# Altium PCB roboARM_PCB_V1I1_1.PcbDoc (part 2 of 2)
Units mm, origin at the board's own origin, x right, y up, seen from the top; angles counter-clockwise.
Board outline 55 x 50 mm, 2 copper layers (Top Layer, Bottom Layer); 48 components, 40 nets, 193 pads, 2135 vias.
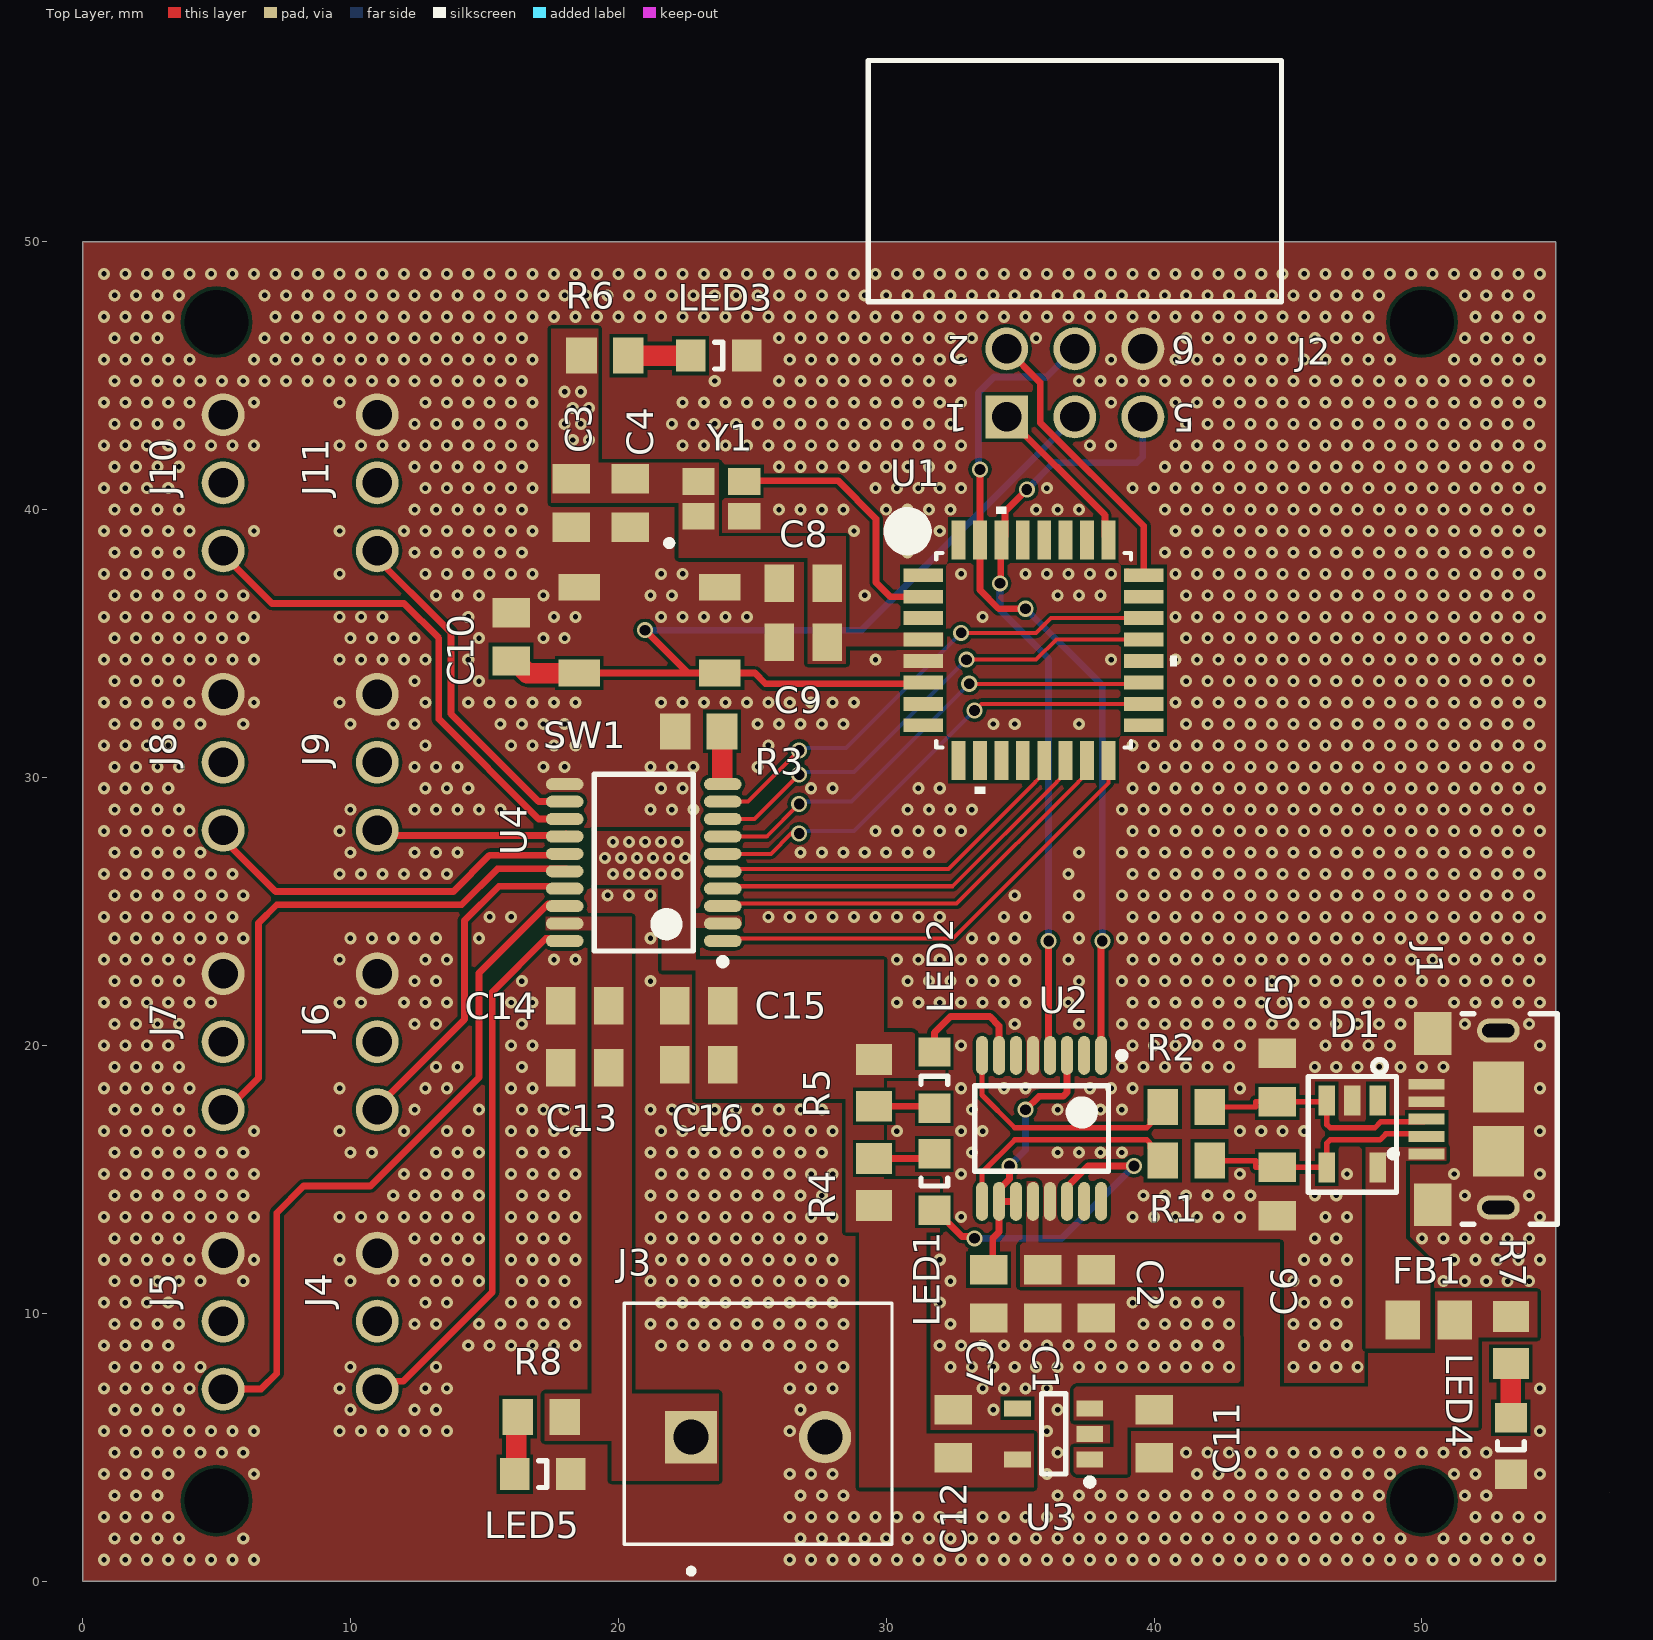
[diagram p0: Top Layer view]

## Via types
v1: diameter 0.45, hole 0.2, Top Layer to Bottom Layer, tented both sides, 2116 vias
v2: diameter 0.6, hole 0.4, Top Layer to Bottom Layer, tented both sides, 19 vias

## Nets (pads, with @x,y where several pads share a name; then routed paths per layer and width w, separated by ;. In a path a pad name is that pad's centre, name@x,y a point inside that pad or via, vN(x,y) a via of type N, cw(c..) or ccw(c..) an arc to the next point about the centre after c; other vN are vias at no path point) (continued)
GND: (continued)
  other v1: 0.8,0.8 1.6,0.8 2.4,0.8 3.2,0.8 4,0.8 4.8,0.8 5.6,0.8 6.4,0.8 26.4,0.8 27.2,0.8 28,0.8 28.8,0.8 29.6,0.8 30.4,0.8 31.2,0.8 32,0.8 32.8,0.8 33.6,0.8 34.4,0.8 35.2,0.8 36,0.8 36.8,0.8 37.6,0.8 38.4,0.8 39.2,0.8 40,0.8 40.8,0.8 41.6,0.8 42.4,0.8 43.2,0.8 44,0.8 44.8,0.8 45.6,0.8 46.4,0.8 47.2,0.8 48,0.8 48.8,0.8 49.6,0.8 50.4,0.8 51.2,0.8 52,0.8 52.8,0.8 53.6,0.8 54.4,0.8 1.2,1.6 2,1.6 2.8,1.6 3.6,1.6 6,1.6 26.8,1.6 27.6,1.6 28.4,1.6 29.2,1.6 30,1.6 30.8,1.6 31.6,1.6 32.4,1.6 33.2,1.6 34,1.6 34.8,1.6 35.6,1.6 36.4,1.6 37.2,1.6 38,1.6 38.8,1.6 39.6,1.6 40.4,1.6 41.2,1.6 42,1.6 42.8,1.6 43.6,1.6 44.4,1.6 45.2,1.6 46,1.6 46.8,1.6 47.6,1.6 48.4,1.6 49.2,1.6 50.8,1.6 51.6,1.6 52.4,1.6 53.2,1.6 54,1.6 0.8,2.4 1.6,2.4 2.4,2.4 3.2,2.4 26.4,2.4 27.2,2.4 28,2.4 28.8,2.4 29.6,2.4 30.4,2.4 31.2,2.4 32,2.4 32.8,2.4 33.6,2.4 34.4,2.4 35.2,2.4 36,2.4 36.8,2.4 37.6,2.4 38.4,2.4 39.2,2.4 40,2.4 40.8,2.4 41.6,2.4 42.4,2.4 43.2,2.4 44,2.4 44.8,2.4 45.6,2.4 46.4,2.4 47.2,2.4 48,2.4 52,2.4 52.8,2.4 53.6,2.4 54.4,2.4 1.2,3.2 2,3.2 2.8,3.2 26.8,3.2 27.6,3.2 28.4,3.2 36.4,3.2 37.2,3.2 38,3.2 38.8,3.2 39.6,3.2 40.4,3.2 41.2,3.2 42,3.2 42.8,3.2 43.6,3.2 44.4,3.2 45.2,3.2 46,3.2 46.8,3.2 47.6,3.2 48.4,3.2 51.6,3.2 52.4,3.2 0.8,4 1.6,4 2.4,4 3.2,4 6.4,4 26.4,4 27.2,4 28,4 36,4 41.6,4 42.4,4 43.2,4 44,4 44.8,4 45.6,4 46.4,4 47.2,4 48,4 48.8,4 51.2,4 52,4 54.4,4 1.2,4.8 2,4.8 2.8,4.8 3.6,4.8 4.4,4.8 5.2,4.8 6,4.8 36.4,4.8 41.2,4.8 42,4.8 42.8,4.8 43.6,4.8 44.4,4.8 45.2,4.8 46,4.8 46.8,4.8 47.6,4.8 48.4,4.8 49.2,4.8 50,4.8 50.8,4.8 51.6,4.8 52.4,4.8 0.8,5.6 1.6,5.6 2.4,5.6 3.2,5.6 4,5.6 4.8,5.6 5.6,5.6 6.4,5.6 9.6,5.6 10.4,5.6 11.2,5.6 12,5.6 12.8,5.6 13.6,5.6 26.4,5.6 36,5.6 54.4,5.6 1.2,6.4 2,6.4 2.8,6.4 3.6,6.4 10,6.4 12.4,6.4 13.2,6.4 26.8,6.4 34,6.4 36.4,6.4 0.8,7.2 1.6,7.2 2.4,7.2 3.2,7.2 4,7.2 9.6,7.2 12.8,7.2 13.6,7.2 26.4,7.2 27.2,7.2 28,7.2 33.6,7.2 34.4,7.2 35.2,7.2 36,7.2 54.4,7.2 1.2,8 2,8 2.8,8 3.6,8 4.4,8 10,8 13.2,8 26.8,8 27.6,8 28.4,8 32.4,8 33.2,8 34,8 34.8,8 35.6,8 36.4,8 37.2,8 38,8 38.8,8 39.6,8 40.4,8 41.2,8 42,8 42.8,8 45.2,8 46,8 46.8,8 47.6,8 0.8,8.8 1.6,8.8 2.4,8.8 3.2,8.8 14.4,8.8 15.2,8.8 16,8.8 16.8,8.8 17.6,8.8 18.4,8.8 21.6,8.8 22.4,8.8 23.2,8.8 24,8.8 24.8,8.8 25.6,8.8 26.4,8.8 27.2,8.8 28,8.8 32,8.8 32.8,8.8 33.6,8.8 34.4,8.8 35.2,8.8 36,8.8 36.8,8.8 37.6,8.8 38.4,8.8 39.2,8.8 40,8.8 40.8,8.8 41.6,8.8 42.4,8.8 45.6,8.8 46.4,8.8 47.2,8.8 1.2,9.6 2,9.6 2.8,9.6 3.6,9.6 12.4,9.6 13.2,9.6 14.8,9.6 15.6,9.6 16.4,9.6 17.2,9.6 18,9.6 21.2,9.6 22,9.6 22.8,9.6 23.6,9.6 24.4,9.6 25.2,9.6 26,9.6 26.8,9.6 27.6,9.6 28.4,9.6 32.4,9.6 39.6,9.6 40.4,9.6 41.2,9.6 42,9.6 42.8,9.6 45.2,9.6 46,9.6 46.8,9.6 0.8,10.4 1.6,10.4 2.4,10.4 3.2,10.4 12.8,10.4 13.6,10.4 16,10.4 16.8,10.4 17.6,10.4 18.4,10.4 21.6,10.4 22.4,10.4 23.2,10.4 24,10.4 24.8,10.4 25.6,10.4 26.4,10.4 27.2,10.4 28,10.4 32,10.4 39.2,10.4 40,10.4 40.8,10.4 41.6,10.4 42.4,10.4 45.6,10.4 46.4,10.4 47.2,10.4 1.2,11.2 2,11.2 2.8,11.2 3.6,11.2 4.4,11.2 6,11.2 10,11.2 11.6,11.2 12.4,11.2 13.2,11.2 14,11.2 14.8,11.2 16.4,11.2 17.2,11.2 18,11.2 21.2,11.2 22,11.2 22.8,11.2 23.6,11.2 24.4,11.2 25.2,11.2 26,11.2 26.8,11.2 27.6,11.2 28.4,11.2 32.4,11.2 45.2,11.2 46,11.2 46.8,11.2 50.8,11.2 51.6,11.2 52.4,11.2 53.2,11.2 54,11.2 0.8,12 1.6,12 2.4,12 3.2,12 4,12 6.4,12 9.6,12 12.8,12 13.6,12 14.4,12 16,12 16.8,12 17.6,12 18.4,12 21.6,12 22.4,12 23.2,12 24,12 24.8,12 25.6,12 26.4,12 27.2,12 28,12 32,12 45.6,12 46.4,12 47.2,12 51.2,12 52,12 52.8,12 53.6,12 54.4,12 1.2,12.8 2,12.8 2.8,12.8 3.6,12.8 12.4,12.8 13.2,12.8 14,12.8 14.8,12.8 16.4,12.8 17.2,12.8 18,12.8 21.2,12.8 22,12.8 22.8,12.8 23.6,12.8 24.4,12.8 25.2,12.8 26,12.8 26.8,12.8 27.6,12.8 46,12.8 46.8,12.8 50,12.8 50.8,12.8 51.6,12.8 52.4,12.8 53.2,12.8 54,12.8 0.8,13.6 1.6,13.6 2.4,13.6 3.2,13.6 4,13.6 4.8,13.6 5.6,13.6 6.4,13.6 9.6,13.6 10.4,13.6 11.2,13.6 12,13.6 12.8,13.6 13.6,13.6 14.4,13.6 16,13.6 16.8,13.6 17.6,13.6 18.4,13.6 21.6,13.6 22.4,13.6 23.2,13.6 24,13.6 24.8,13.6 25.6,13.6 26.4,13.6 27.2,13.6 28,13.6 32.8,13.6 39.2,13.6 40,13.6 40.8,13.6 41.6,13.6 42.4,13.6 43.2,13.6 46.4,13.6 47.2,13.6 54.4,13.6 1.2,14.4 2,14.4 2.8,14.4 3.6,14.4 4.4,14.4 5.2,14.4 6,14.4 11.6,14.4 12.4,14.4 13.2,14.4 14,14.4 14.8,14.4 16.4,14.4 17.2,14.4 18,14.4 21.2,14.4 22,14.4 22.8,14.4 23.6,14.4 24.4,14.4 25.2,14.4 26,14.4 26.8,14.4 27.6,14.4 39.6,14.4 40.4,14.4 41.2,14.4 42,14.4 42.8,14.4 43.6,14.4 46,14.4 46.8,14.4 51.6,14.4 54,14.4 0.8,15.2 1.6,15.2 2.4,15.2 3.2,15.2 4,15.2 4.8,15.2 5.6,15.2 6.4,15.2 12,15.2 12.8,15.2 13.6,15.2 14.4,15.2 16,15.2 16.8,15.2 17.6,15.2 18.4,15.2 21.6,15.2 22.4,15.2 23.2,15.2 24,15.2 24.8,15.2 25.6,15.2 26.4,15.2 27.2,15.2 28,15.2 32.8,15.2 43.2,15.2 47.2,15.2 51.2,15.2 54.4,15.2 1.2,16 2,16 2.8,16 3.6,16 4.4,16 5.2,16 6,16 10,16 10.8,16 13.2,16 14,16 14.8,16 16.4,16 17.2,16 18,16 21.2,16 22,16 22.8,16 23.6,16 24.4,16 25.2,16 26,16 26.8,16 27.6,16 33.2,16 36.4,16 37.2,16 38,16 38.8,16 0.8,16.8 1.6,16.8 2.4,16.8 3.2,16.8 4,16.8 6.4,16.8 9.6,16.8 12,16.8 13.6,16.8 14.4,16.8 16,16.8 16.8,16.8 17.6,16.8 18.4,16.8 21.6,16.8 22.4,16.8 23.2,16.8 24,16.8 24.8,16.8 25.6,16.8 26.4,16.8 27.2,16.8 28,16.8 30.4,16.8 32.8,16.8 33.6,16.8 43.2,16.8 44,16.8 44.8,16.8 45.6,16.8 54.4,16.8 1.2,17.6 2,17.6 2.8,17.6 3.6,17.6 12.4,17.6 14.8,17.6 16.4,17.6 17.2,17.6 18,17.6 21.2,17.6 22,17.6 22.8,17.6 23.6,17.6 24.4,17.6 25.2,17.6 26,17.6 26.8,17.6 27.6,17.6 33.2,17.6 36.4,17.6 37.2,17.6 38,17.6 38.8,17.6 0.8,18.4 1.6,18.4 2.4,18.4 3.2,18.4 4,18.4 9.6,18.4 12.8,18.4 13.6,18.4 16,18.4 16.8,18.4 32.8,18.4 34.4,18.4 35.2,18.4 37.6,18.4 38.4,18.4 39.2,18.4 43.2,18.4 54.4,18.4 1.2,19.2 2,19.2 2.8,19.2 3.6,19.2 13.2,19.2 14,19.2 16.4,19.2 38.8,19.2 39.6,19.2 40.4,19.2 41.2,19.2 42,19.2 42.8,19.2 46,19.2 46.8,19.2 47.6,19.2 48.4,19.2 49.2,19.2 50,19.2 50.8,19.2 0.8,20 1.6,20 2.4,20 3.2,20 16,20 16.8,20 32.8,20 39.2,20 40,20 40.8,20 41.6,20 42.4,20 43.2,20 46.4,20 47.2,20 48,20 48.8,20 54.4,20 1.2,20.8 2,20.8 2.8,20.8 3.6,20.8 12.4,20.8 13.2,20.8 16.4,20.8 34.8,20.8 37.2,20.8 38.8,20.8 39.6,20.8 40.4,20.8 41.2,20.8 42,20.8 42.8,20.8 43.6,20.8 44.4,20.8 45.2,20.8 46,20.8 46.8,20.8 47.6,20.8 48.4,20.8 49.2,20.8 51.6,20.8 54,20.8 0.8,21.6 1.6,21.6 2.4,21.6 3.2,21.6 4,21.6 4.8,21.6 9.6,21.6 10.4,21.6 12,21.6 12.8,21.6 13.6,21.6 16,21.6 16.8,21.6 30.4,21.6 31.2,21.6 32,21.6 32.8,21.6 33.6,21.6 34.4,21.6 35.2,21.6 36.8,21.6 39.2,21.6 40,21.6 40.8,21.6 41.6,21.6 42.4,21.6 43.2,21.6 44,21.6 44.8,21.6 45.6,21.6 46.4,21.6 47.2,21.6 48,21.6 48.8,21.6 49.6,21.6 51.2,21.6 52,21.6 52.8,21.6 53.6,21.6 54.4,21.6 1.2,22.4 2,22.4 2.8,22.4 3.6,22.4 12.4,22.4 13.2,22.4 16.4,22.4 21.2,22.4 30.8,22.4 31.6,22.4 32.4,22.4 33.2,22.4 34,22.4 34.8,22.4 37.2,22.4 38.8,22.4 39.6,22.4 40.4,22.4 41.2,22.4 42,22.4 42.8,22.4 43.6,22.4 44.4,22.4 45.2,22.4 46,22.4 46.8,22.4 47.6,22.4 48.4,22.4 49.2,22.4 50,22.4 50.8,22.4 51.6,22.4 52.4,22.4 53.2,22.4 54,22.4 0.8,23.2 1.6,23.2 2.4,23.2 3.2,23.2 4,23.2 9.6,23.2 12.8,23.2 13.6,23.2 17.6,23.2 18.4,23.2 30.4,23.2 31.2,23.2 32,23.2 32.8,23.2 33.6,23.2 34.4,23.2 35.2,23.2 36.8,23.2 39.2,23.2 40,23.2 40.8,23.2 41.6,23.2 42.4,23.2 43.2,23.2 44,23.2 44.8,23.2 45.6,23.2 46.4,23.2 47.2,23.2 48,23.2 48.8,23.2 49.6,23.2 50.4,23.2 51.2,23.2 52,23.2 52.8,23.2 53.6,23.2 54.4,23.2 1.2,24 2,24 2.8,24 3.6,24 4.4,24 5.2,24 6,24 10,24 10.8,24 11.6,24 12.4,24 13.2,24 14.8,24 21.2,24 33.2,24 34,24 34.8,24 37.2,24 38.8,24 39.6,24 40.4,24 41.2,24 42,24 42.8,24 43.6,24 44.4,24 45.2,24 46,24 46.8,24 47.6,24 48.4,24 49.2,24 50,24 50.8,24 51.6,24 52.4,24 53.2,24 54,24 0.8,24.8 1.6,24.8 2.4,24.8 3.2,24.8 4,24.8 4.8,24.8 5.6,24.8 15.2,24.8 16,24.8 25.6,24.8 26.4,24.8 27.2,24.8 28,24.8 28.8,24.8 29.6,24.8 30.4,24.8 31.2,24.8 32,24.8 34.4,24.8 35.2,24.8 36.8,24.8 39.2,24.8 40,24.8 40.8,24.8 41.6,24.8 42.4,24.8 43.2,24.8 44,24.8 44.8,24.8 45.6,24.8 46.4,24.8 47.2,24.8 48,24.8 48.8,24.8 49.6,24.8 50.4,24.8 51.2,24.8 52,24.8 52.8,24.8 53.6,24.8 54.4,24.8 1.2,25.6 2,25.6 2.8,25.6 3.6,25.6 4.4,25.6 5.2,25.6 6,25.6 19.6,25.6 20.4,25.6 21.2,25.6 34.8,25.6 37.2,25.6 38.8,25.6 39.6,25.6 40.4,25.6 41.2,25.6 42,25.6 42.8,25.6 43.6,25.6 44.4,25.6 45.2,25.6 46,25.6 46.8,25.6 47.6,25.6 48.4,25.6 49.2,25.6 50,25.6 50.8,25.6 51.6,25.6 52.4,25.6 53.2,25.6 54,25.6 0.8,26.4 1.6,26.4 2.4,26.4 3.2,26.4 4,26.4 4.8,26.4 5.6,26.4 9.6,26.4 10.4,26.4 11.2,26.4 12,26.4 12.8,26.4 13.6,26.4 36.8,26.4 39.2,26.4 40,26.4 40.8,26.4 41.6,26.4 42.4,26.4 43.2,26.4 44,26.4 44.8,26.4 45.6,26.4 46.4,26.4 47.2,26.4 48,26.4 48.8,26.4 49.6,26.4 50.4,26.4 51.2,26.4 52,26.4 52.8,26.4 53.6,26.4 54.4,26.4 1.2,27.2 2,27.2 2.8,27.2 3.6,27.2 4.4,27.2 10,27.2 12.4,27.2 13.2,27.2 14,27.2 26.8,27.2 27.6,27.2 28.4,27.2 29.2,27.2 30,27.2 30.8,27.2 31.6,27.2 37.2,27.2 38.8,27.2 39.6,27.2 40.4,27.2 41.2,27.2 42,27.2 42.8,27.2 43.6,27.2 44.4,27.2 45.2,27.2 46,27.2 46.8,27.2 47.6,27.2 48.4,27.2 49.2,27.2 50,27.2 50.8,27.2 51.6,27.2 52.4,27.2 53.2,27.2 54,27.2 0.8,28 1.6,28 2.4,28 3.2,28 4,28 9.6,28 29.6,28 30.4,28 31.2,28 32,28 32.8,28 39.2,28 40,28 40.8,28 41.6,28 42.4,28 43.2,28 44,28 44.8,28 45.6,28 46.4,28 47.2,28 48,28 48.8,28 49.6,28 50.4,28 51.2,28 52,28 52.8,28 53.6,28 54.4,28 1.2,28.8 2,28.8 2.8,28.8 3.6,28.8 10,28.8 12.4,28.8 13.2,28.8 14,28.8 14.8,28.8 15.6,28.8 21.2,28.8 22,28.8 22.8,28.8 30.8,28.8 31.6,28.8 32.4,28.8 33.2,28.8 38.8,28.8 39.6,28.8 40.4,28.8 41.2,28.8 42,28.8 42.8,28.8 43.6,28.8 44.4,28.8 45.2,28.8 46,28.8 46.8,28.8 47.6,28.8 48.4,28.8 49.2,28.8 50,28.8 50.8,28.8 51.6,28.8 52.4,28.8 53.2,28.8 54,28.8 0.8,29.6 1.6,29.6 2.4,29.6 3.2,29.6 12.8,29.6 13.6,29.6 14.4,29.6 21.6,29.6 22.4,29.6 27.2,29.6 28,29.6 31.2,29.6 32,29.6 39.2,29.6 40,29.6 40.8,29.6 41.6,29.6 42.4,29.6 43.2,29.6 44,29.6 44.8,29.6 45.6,29.6 46.4,29.6 47.2,29.6 48,29.6 48.8,29.6 49.6,29.6 50.4,29.6 51.2,29.6 52,29.6 52.8,29.6 53.6,29.6 54.4,29.6 1.2,30.4 2,30.4 2.8,30.4 3.6,30.4 12.4,30.4 13.2,30.4 14,30.4 17.2,30.4 18,30.4 21.2,30.4 22,30.4 22.8,30.4 25.2,30.4 39.6,30.4 40.4,30.4 41.2,30.4 42,30.4 42.8,30.4 43.6,30.4 44.4,30.4 45.2,30.4 46,30.4 46.8,30.4 47.6,30.4 48.4,30.4 49.2,30.4 50,30.4 50.8,30.4 51.6,30.4 52.4,30.4 53.2,30.4 54,30.4 0.8,31.2 1.6,31.2 2.4,31.2 3.2,31.2 12.8,31.2 16,31.2 16.8,31.2 17.6,31.2 18.4,31.2 25.6,31.2 39.2,31.2 40,31.2 40.8,31.2 41.6,31.2 42.4,31.2 43.2,31.2 44,31.2 44.8,31.2 45.6,31.2 46.4,31.2 47.2,31.2 48,31.2 48.8,31.2 49.6,31.2 50.4,31.2 51.2,31.2 52,31.2 52.8,31.2 53.6,31.2 54.4,31.2 1.2,32 2,32 2.8,32 3.6,32 4.4,32 6,32 10,32 11.6,32 12.4,32 15.6,32 16.4,32 17.2,32 18,32 25.2,32 26,32 26.8,32 27.6,32 28.4,32 34,32 34.8,32 37.2,32 41.2,32 42,32 42.8,32 43.6,32 44.4,32 45.2,32 46,32 46.8,32 47.6,32 48.4,32 49.2,32 50,32 50.8,32 51.6,32 52.4,32 53.2,32 54,32 0.8,32.8 1.6,32.8 2.4,32.8 3.2,32.8 4,32.8 6.4,32.8 9.6,32.8 12.8,32.8 14.4,32.8 15.2,32.8 16,32.8 16.8,32.8 17.6,32.8 18.4,32.8 21.6,32.8 22.4,32.8 23.2,32.8 24,32.8 24.8,32.8 25.6,32.8 26.4,32.8 27.2,32.8 28,32.8 28.8,32.8 40.8,32.8 41.6,32.8 42.4,32.8 43.2,32.8 44,32.8 44.8,32.8 45.6,32.8 46.4,32.8 47.2,32.8 48,32.8 48.8,32.8 49.6,32.8 50.4,32.8 51.2,32.8 52,32.8 52.8,32.8 53.6,32.8 54.4,32.8 1.2,33.6 2,33.6 2.8,33.6 3.6,33.6 12.4,33.6 14.8,33.6 41.2,33.6 42,33.6 42.8,33.6 43.6,33.6 44.4,33.6 45.2,33.6 46,33.6 46.8,33.6 47.6,33.6 48.4,33.6 49.2,33.6 50,33.6 50.8,33.6 51.6,33.6 52.4,33.6 53.2,33.6 54,33.6 0.8,34.4 1.6,34.4 2.4,34.4 3.2,34.4 4,34.4 4.8,34.4 5.6,34.4 6.4,34.4 9.6,34.4 10.4,34.4 11.2,34.4 12,34.4 12.8,34.4 14.4,34.4 29.6,34.4 38.4,34.4 40.8,34.4 41.6,34.4 42.4,34.4 43.2,34.4 44,34.4 44.8,34.4 45.6,34.4 46.4,34.4 47.2,34.4 48,34.4 48.8,34.4 49.6,34.4 50.4,34.4 51.2,34.4 52,34.4 52.8,34.4 53.6,34.4 54.4,34.4 1.2,35.2 2,35.2 2.8,35.2 3.6,35.2 4.4,35.2 5.2,35.2 6,35.2 10,35.2 10.8,35.2 11.6,35.2 12.4,35.2 14.8,35.2 17.2,35.2 18,35.2 41.2,35.2 42,35.2 42.8,35.2 43.6,35.2 44.4,35.2 45.2,35.2 46,35.2 46.8,35.2 47.6,35.2 48.4,35.2 49.2,35.2 50,35.2 50.8,35.2 51.6,35.2 52.4,35.2 53.2,35.2 54,35.2 0.8,36 1.6,36 2.4,36 3.2,36 4,36 4.8,36 5.6,36 6.4,36 9.6,36 10.4,36 11.2,36 14.4,36 17.6,36 18.4,36 21.6,36 22.4,36 23.2,36 24,36 24.8,36 33.6,36 40.8,36 41.6,36 42.4,36 43.2,36 44,36 44.8,36 45.6,36 46.4,36 47.2,36 48,36 48.8,36 49.6,36 50.4,36 51.2,36 52,36 52.8,36 53.6,36 54.4,36 1.2,36.8 2,36.8 2.8,36.8 3.6,36.8 4.4,36.8 5.2,36.8 6,36.8 13.2,36.8 14,36.8 14.8,36.8 17.2,36.8 21.2,36.8 22,36.8 29.2,36.8 36.4,36.8 37.2,36.8 38,36.8 41.2,36.8 42,36.8 42.8,36.8 43.6,36.8 44.4,36.8 45.2,36.8 46,36.8 46.8,36.8 47.6,36.8 48.4,36.8 49.2,36.8 50,36.8 50.8,36.8 51.6,36.8 52.4,36.8 53.2,36.8 54,36.8 0.8,37.6 1.6,37.6 2.4,37.6 3.2,37.6 4,37.6 9.6,37.6 12.8,37.6 13.6,37.6 14.4,37.6 15.2,37.6 16,37.6 16.8,37.6 21.6,37.6 22.4,37.6 32.8,37.6 35.2,37.6 36,37.6 36.8,37.6 37.6,37.6 38.4,37.6 40.8,37.6 41.6,37.6 42.4,37.6 43.2,37.6 44,37.6 44.8,37.6 45.6,37.6 46.4,37.6 47.2,37.6 48,37.6 48.8,37.6 49.6,37.6 50.4,37.6 51.2,37.6 52,37.6 52.8,37.6 53.6,37.6 54.4,37.6 1.2,38.4 2,38.4 2.8,38.4 3.6,38.4 12.4,38.4 13.2,38.4 14,38.4 14.8,38.4 15.6,38.4 16.4,38.4 30.8,38.4 40.4,38.4 41.2,38.4 42,38.4 42.8,38.4 43.6,38.4 44.4,38.4 45.2,38.4 46,38.4 46.8,38.4 47.6,38.4 48.4,38.4 49.2,38.4 50,38.4 50.8,38.4 51.6,38.4 52.4,38.4 53.2,38.4 54,38.4 0.8,39.2 1.6,39.2 2.4,39.2 3.2,39.2 4,39.2 6.4,39.2 9.6,39.2 12,39.2 12.8,39.2 13.6,39.2 14.4,39.2 15.2,39.2 16,39.2 16.8,39.2 28.8,39.2 30.4,39.2 31.2,39.2 32,39.2 40.8,39.2 41.6,39.2 42.4,39.2 43.2,39.2 44,39.2 44.8,39.2 45.6,39.2 46.4,39.2 47.2,39.2 48,39.2 48.8,39.2 49.6,39.2 50.4,39.2 51.2,39.2 52,39.2 52.8,39.2 53.6,39.2 54.4,39.2 1.2,40 2,40 2.8,40 3.6,40 12.4,40 13.2,40 14,40 14.8,40 15.6,40 16.4,40 26,40 26.8,40 27.6,40 28.4,40 30,40 30.8,40 31.6,40 32.4,40 35.6,40 36.4,40 37.2,40 40.4,40 41.2,40 42,40 42.8,40 43.6,40 44.4,40 45.2,40 46,40 46.8,40 47.6,40 48.4,40 49.2,40 50,40 50.8,40 51.6,40 52.4,40 53.2,40 54,40 0.8,40.8 1.6,40.8 2.4,40.8 3.2,40.8 12.8,40.8 13.6,40.8 14.4,40.8 15.2,40.8 16,40.8 16.8,40.8 29.6,40.8 30.4,40.8 31.2,40.8 32,40.8 32.8,40.8 36,40.8 39.2,40.8 40,40.8 40.8,40.8 41.6,40.8 42.4,40.8 43.2,40.8 44,40.8 44.8,40.8 45.6,40.8 46.4,40.8 47.2,40.8 48,40.8 48.8,40.8 49.6,40.8 50.4,40.8 51.2,40.8 52,40.8 52.8,40.8 53.6,40.8 54.4,40.8 1.2,41.6 2,41.6 2.8,41.6 3.6,41.6 12.4,41.6 13.2,41.6 14,41.6 14.8,41.6 15.6,41.6 16.4,41.6 26,41.6 26.8,41.6 27.6,41.6 28.4,41.6 29.2,41.6 30,41.6 30.8,41.6 31.6,41.6 32.4,41.6 40.4,41.6 41.2,41.6 42,41.6 42.8,41.6 43.6,41.6 44.4,41.6 45.2,41.6 46,41.6 46.8,41.6 47.6,41.6 48.4,41.6 49.2,41.6 50,41.6 50.8,41.6 51.6,41.6 52.4,41.6 53.2,41.6 54,41.6 0.8,42.4 1.6,42.4 2.4,42.4 3.2,42.4 4,42.4 4.8,42.4 5.6,42.4 6.4,42.4 9.6,42.4 10.4,42.4 11.2,42.4 12,42.4 12.8,42.4 13.6,42.4 14.4,42.4 15.2,42.4 16,42.4 16.8,42.4 22.4,42.4 23.2,42.4 24,42.4 24.8,42.4 25.6,42.4 26.4,42.4 27.2,42.4 28,42.4 28.8,42.4 29.6,42.4 30.4,42.4 31.2,42.4 32,42.4 32.8,42.4 37.6,42.4 38.4,42.4 40.8,42.4 41.6,42.4 42.4,42.4 43.2,42.4 44,42.4 44.8,42.4 45.6,42.4 46.4,42.4 47.2,42.4 48,42.4 48.8,42.4 49.6,42.4 50.4,42.4 51.2,42.4 52,42.4 52.8,42.4 53.6,42.4 54.4,42.4 1.2,43.2 2,43.2 2.8,43.2 3.6,43.2 12.4,43.2 13.2,43.2 14,43.2 14.8,43.2 15.6,43.2 16.4,43.2 22,43.2 22.8,43.2 23.6,43.2 24.4,43.2 25.2,43.2 26,43.2 26.8,43.2 27.6,43.2 28.4,43.2 29.2,43.2 30,43.2 30.8,43.2 31.6,43.2 32.4,43.2 41.2,43.2 42,43.2 42.8,43.2 43.6,43.2 44.4,43.2 45.2,43.2 46,43.2 46.8,43.2 47.6,43.2 48.4,43.2 49.2,43.2 50,43.2 50.8,43.2 51.6,43.2 52.4,43.2 53.2,43.2 54,43.2 0.8,44 1.6,44 2.4,44 3.2,44 4,44 6.4,44 9.6,44 12.8,44 13.6,44 14.4,44 15.2,44 16,44 16.8,44 22.4,44 23.2,44 24,44 24.8,44 25.6,44 26.4,44 27.2,44 28,44 28.8,44 29.6,44 30.4,44 31.2,44 32,44 32.8,44 38.4,44 40.8,44 41.6,44 42.4,44 43.2,44 44,44 44.8,44 45.6,44 46.4,44 47.2,44 48,44 48.8,44 49.6,44 50.4,44 51.2,44 52,44 52.8,44 53.6,44 54.4,44 1.2,44.8 2,44.8 2.8,44.8 3.6,44.8 4.4,44.8 5.2,44.8 6,44.8 6.8,44.8 7.6,44.8 8.4,44.8 9.2,44.8 10,44.8 10.8,44.8 11.6,44.8 12.4,44.8 13.2,44.8 14,44.8 14.8,44.8 15.6,44.8 16.4,44.8 23.6,44.8 26,44.8 26.8,44.8 27.6,44.8 28.4,44.8 29.2,44.8 30,44.8 30.8,44.8 31.6,44.8 32.4,44.8 37.2,44.8 38,44.8 38.8,44.8 39.6,44.8 40.4,44.8 41.2,44.8 42,44.8 42.8,44.8 43.6,44.8 44.4,44.8 45.2,44.8 46,44.8 46.8,44.8 47.6,44.8 48.4,44.8 49.2,44.8 50,44.8 50.8,44.8 51.6,44.8 52.4,44.8 53.2,44.8 54,44.8 0.8,45.6 1.6,45.6 2.4,45.6 3.2,45.6 4,45.6 6.4,45.6 7.2,45.6 8,45.6 8.8,45.6 9.6,45.6 10.4,45.6 11.2,45.6 12,45.6 12.8,45.6 13.6,45.6 14.4,45.6 15.2,45.6 16,45.6 16.8,45.6 26.4,45.6 27.2,45.6 28,45.6 28.8,45.6 29.6,45.6 30.4,45.6 31.2,45.6 32,45.6 32.8,45.6 38.4,45.6 40.8,45.6 41.6,45.6 42.4,45.6 43.2,45.6 44,45.6 44.8,45.6 45.6,45.6 46.4,45.6 47.2,45.6 48,45.6 48.8,45.6 51.2,45.6 52,45.6 52.8,45.6 53.6,45.6 54.4,45.6 1.2,46.4 2,46.4 2.8,46.4 6.8,46.4 7.6,46.4 8.4,46.4 9.2,46.4 10,46.4 10.8,46.4 11.6,46.4 12.4,46.4 13.2,46.4 14,46.4 14.8,46.4 15.6,46.4 16.4,46.4 26,46.4 26.8,46.4 27.6,46.4 28.4,46.4 29.2,46.4 30,46.4 30.8,46.4 31.6,46.4 32.4,46.4 33.2,46.4 35.6,46.4 41.2,46.4 42,46.4 42.8,46.4 43.6,46.4 44.4,46.4 45.2,46.4 46,46.4 46.8,46.4 47.6,46.4 48.4,46.4 51.6,46.4 52.4,46.4 53.2,46.4 54,46.4 0.8,47.2 1.6,47.2 2.4,47.2 3.2,47.2 7.2,47.2 8,47.2 8.8,47.2 9.6,47.2 10.4,47.2 11.2,47.2 12,47.2 12.8,47.2 13.6,47.2 14.4,47.2 15.2,47.2 16,47.2 16.8,47.2 17.6,47.2 18.4,47.2 19.2,47.2 20,47.2 20.8,47.2 21.6,47.2 22.4,47.2 23.2,47.2 24,47.2 24.8,47.2 25.6,47.2 26.4,47.2 27.2,47.2 28,47.2 28.8,47.2 29.6,47.2 30.4,47.2 31.2,47.2 32,47.2 32.8,47.2 33.6,47.2 34.4,47.2 35.2,47.2 36,47.2 36.8,47.2 37.6,47.2 38.4,47.2 39.2,47.2 40,47.2 40.8,47.2 41.6,47.2 42.4,47.2 43.2,47.2 44,47.2 44.8,47.2 45.6,47.2 46.4,47.2 47.2,47.2 48,47.2 52,47.2 52.8,47.2 53.6,47.2 54.4,47.2 1.2,48 2,48 2.8,48 3.6,48 6.8,48 7.6,48 8.4,48 9.2,48 10,48 10.8,48 11.6,48 12.4,48 13.2,48 14,48 14.8,48 15.6,48 16.4,48 17.2,48 18,48 18.8,48 19.6,48 20.4,48 21.2,48 22,48 22.8,48 23.6,48 24.4,48 25.2,48 26,48 26.8,48 27.6,48 28.4,48 29.2,48 30,48 30.8,48 31.6,48 32.4,48 33.2,48 34,48 34.8,48 35.6,48 36.4,48 37.2,48 38,48 38.8,48 39.6,48 40.4,48 41.2,48 42,48 42.8,48 43.6,48 44.4,48 45.2,48 46,48 46.8,48 47.6,48 48.4,48 51.6,48 52.4,48 53.2,48 54,48 0.8,48.8 1.6,48.8 2.4,48.8 3.2,48.8 4,48.8 4.8,48.8 5.6,48.8 6.4,48.8 7.2,48.8 8,48.8 8.8,48.8 9.6,48.8 10.4,48.8 11.2,48.8 12,48.8 12.8,48.8 13.6,48.8 14.4,48.8 15.2,48.8 16,48.8 16.8,48.8 17.6,48.8 18.4,48.8 19.2,48.8 20,48.8 20.8,48.8 21.6,48.8 22.4,48.8 23.2,48.8 24,48.8 24.8,48.8 25.6,48.8 26.4,48.8 27.2,48.8 28,48.8 28.8,48.8 29.6,48.8 30.4,48.8 31.2,48.8 32,48.8 32.8,48.8 33.6,48.8 34.4,48.8 35.2,48.8 36,48.8 36.8,48.8 37.6,48.8 38.4,48.8 39.2,48.8 40,48.8 40.8,48.8 41.6,48.8 42.4,48.8 43.2,48.8 44,48.8 44.8,48.8 45.6,48.8 46.4,48.8 47.2,48.8 48,48.8 48.8,48.8 49.6,48.8 50.4,48.8 51.2,48.8 52,48.8 52.8,48.8 53.6,48.8 54.4,48.8
MCU_CLK: U1.2 Y1.3 | length 9.9
  Top Layer w0.254: Y1.3 24.729,41.079 28.198,41.079 29.621,39.656 29.621,37.279 30.15,36.75 U1.2
NetC7_2: C7.2 U2.3 U2.10 U2.11 | length 10.4
  Top Layer w0.254: C7.2@33.85,11.625 33.975,11.75 33.975,12.8 34.212,13.037 U2.10 ; v2(34.6,15.5) 34.6,15.009 34.212,14.622 U2.10 ; U2.11 U2.10 ; v2(35.2,17.6) 35.7,18.1 36.604,18.1 36.752,18.249 U2.3
  Bottom Layer w0.254: v2(34.6,15.5) 35.2,16.1 v2(35.2,17.6)
NetD1_5: D1.5 FB1.1 J1.1
NetLED1_2: LED1.2 R4.2 | length 2.3
  Top Layer w0.254: R4.2 31.625,15.775 LED1.2
NetLED2_2: LED2.2 R5.2 | length 2.3
  Top Layer w0.254: R5.2 31.725,17.729 LED2.2
NetLED3_2: LED3.2 R6.2 | length 2.3
  Top Layer w0.768: R6.2 LED3.2
NetLED4_2: LED4.2 R7.1 | length 2
  Top Layer w0.768: LED4.2 R7.1
NetLED5_2: LED5.2 R8.1 | length 2.2
  Top Layer w0.768: LED5.2 16.191,4.059 16.191,6.07 R8.1
NetR3_2: R3.2 U4.10 | length 1.9
  Top Layer w0.768: R3.2 23.875,31.625 24,31.5 23.958,31.5 23.888,31.43 U4.10@23.888,29.909
NRST: C10.2 J2.3 SW1.3 SW1.4 U1.6 | length 37.4
  Top Layer w0.254: SW1.3 22.6,33.9 ; v2(21,35.5) 22.6,33.9 ; U1.6 31.335,33.5 25.5,33.5 25.1,33.9 SW1.4 22.6,33.9
  Top Layer w0.768: C10.2 16.15,34.35 16.6,33.9 SW1.3
  Bottom Layer w0.254: v2(21,35.5) 29.08,35.5 J2.3
PWM1: J4.1 U4.20 | length 21
  Top Layer w0.254: J4.1@10.5,7.46 11.96,7.46 15.298,10.798 15.298,21.998 17.291,23.991 U4.20@18.05,23.991
PWM1_3V3: U1.16 U4.1 | length 17.6
  Top Layer w0.15: U4.1@23.95,23.991 32.491,23.991 38.3,29.8 U1.16
PWM2: J5.1 U4.18 | length 26.1
  Top Layer w0.254: J5.1 6.67,7.17 7.25,7.75 7.25,13.75 8.25,14.75 10.75,14.75 14.8,18.8 14.8,22.7 17.391,25.291 U4.18@18.05,25.291
PWM2_3V3: U1.15 U4.3 | length 16
  Top Layer w0.15: U4.3@23.95,25.291 32.632,25.291 37.161,29.821 37.161,29.823 37.5,30.163 U1.15
PWM3: J6.1 U4.17 | length 13
  Top Layer w0.254: J6.1@10.75,17.46 14.264,20.974 14.264,24.664 15.541,25.941 U4.17@18.05,25.941
PWM3_3V3: U1.14 U4.4 | length 15
  Top Layer w0.15: U4.4@23.95,25.941 32.482,25.941 36.361,29.821 36.361,29.823 36.7,30.163 U1.14
PWM4: J7.1 U4.16 | length 20
  Top Layer w0.254: J7.1@5.25,17.46 6.57,18.78 6.57,24.57 7.25,25.25 14.15,25.25 15.491,26.591 U4.16@18.05,26.591
PWM4_3V3: U1.13 U4.5 | length 13.9
  Top Layer w0.15: U4.5@23.95,26.591 32.329,26.591 35.439,29.702 35.442,29.702 35.561,29.821 35.561,29.823 35.9,30.163 U1.13
PWM5: J8.1 U4.15 | length 14.1
  Top Layer w0.254: J8.1@5.25,27.71 7.21,25.75 13.85,25.75 15.2,27.1 17.95,27.1 U4.15
PWM5_3V3: U1.18 U4.6 | length 17.9
  Top Layer w0.15: U4.6 25.691,27.15 26.45,27.909 v2(26.75,27.909) ; v2(33.3,32.5) 33.55,32.75 U1.18
  Bottom Layer w0.15: v2@26.8,28 28.8,28 v2(33.3,32.5)
PWM6: J9.1 U4.14 | length 7.4
  Top Layer w0.254: J9.1@10.75,27.71 10.874,27.834 17.993,27.834 U4.14@18.05,27.891
PWM6_3V3: U1.19 U4.7 | length 18
  Top Layer w0.15: U4.7 25.541,27.8 v2(26.75,29.009) ; v2(33.1,33.5) 39.565,33.5 U1.19
  Bottom Layer w0.15: v2@26.8,29.1 28.7,29.1 v2(33.1,33.5)
PWM7: J10.1 U4.13 | length 18.8
  Top Layer w0.254: J10.1@5.115,38.46 7.075,36.5 12,36.5 13.3,35.2 13.3,32.177 17.027,28.45 U4.13
PWM7_3V3: U1.21 U4.8 | length 18.4
  Top Layer w0.15: U4.8 25.091,28.45 v2(26.75,30.109) ; v2(33,34.4) 35.6,34.4 36.35,35.15 U1.21
  Bottom Layer w0.15: v2@26.8,30.2 28.8,30.2 v2(33,34.4)
PWM8: J11.1 U4.12 | length 13
  Top Layer w0.254: J11.1@10.703,38.46 13.75,35.413 13.75,32.377 17.027,29.1 U4.12
PWM8_3V3: U1.22 U4.9 | length 18.5
  Top Layer w0.15: U4.9 23.904,29.104 24.846,29.104 v2(26.75,31.009) ; v2(32.8,35.4) 35.6,35.4 36.15,35.95 U1.22
  Bottom Layer w0.15: v2@26.8,31.1 28.5,31.1 v2(32.8,35.4)
SWCLK: J2.1 U1.25 | length 6.2
  Top Layer w0.254: J2.1 38.168,39.792 38.168,38.996 U1.25
SWDIO: J2.2 U1.24 | length 11.2
  Top Layer w0.254: J2.2 35.75,44.75 35.75,43.25 39.615,39.385 U1.24 39.142,37.55 U1.24@39.011,37.682
USART_RX: J2.4 U1.31 U2.1 | length 31.5
  Top Layer w0.254: v2(33.5,41.5) U1.31 33.5,37 34.2,36.3 v2(35.2,36.3) ; U2.1 38.022,23.723 v2@38.067,23.767
  Bottom Layer w0.254: v2(33.5,41.5) 33.446,41.554 33.446,44.365 34.027,44.946 35.986,44.946 J2.4 ; v2(35.2,36.3) 38.067,33.433 v2@38.067,23.767
  other v2: 38.067,23.9
USART_TX: J2.5 U1.30 U2.4 | length 28.6
  Top Layer w0.254: v2(34.25,37.25) 34.275,37.275 34.275,38.84 U1.30 34.432,38.996 34.432,39.932 v2(35.25,40.75) ; v2@36.063,23.837 36.063,19.679 U2.4
  Bottom Layer w0.254: v2(34.25,37.25) 34.25,36.25 36.063,34.437 v2@36.063,23.837 ; v2(35.25,40.75) 36.25,41.75 39.351,41.75 39.58,41.979 J2.5
  other v2: 36.063,23.9
USB_N: R1.2 U2.9 | length 8.8
  Top Layer w0.2: U2.9 33.577,15.25 34.8,16.473 39.733,16.473 39.85,16.356 39.85,16.175 R1.2
USB_P: R2.2 U2.8 | length 9.2
  Top Layer w0.2: U2.8 33.577,18.15 34.8,16.927 39.733,16.927 39.85,17.044 39.85,17.225 R2.2
USB_PRE_N: C6.2 D1.4 J1.2 R1.1 | length 9.4
  Top Layer w0.2: R1.1 43.8,15.7 43.8,15.45 C6.2 45.4,15.45 D1.4 46.45,16.356 46.567,16.473 48.427,16.473 48.652,16.698 50.077,16.698 J1.2
USB_PRE_P: C5.2 D1.3 J1.3 R2.1 | length 9.4
  Top Layer w0.2: R2.1 43.8,17.7 43.8,17.9 C5.2 D1.3@46.45,17.9 ; D1.3 D1.3@46.45,17.9 ; J1.3 50.077,17.152 48.464,17.152 48.239,16.927 46.567,16.927 46.45,17.044 D1.3@46.45,17.9
VSERVO: C13.2 C14.2 J3.1 J4.2 J5.2 J6.2 J7.2 J8.2 J9.2 J10.2 J11.2 R8.2 U4.19
VUSB: C1.2 C2.2 C11.2 FB1.2 R7.2 U2.12 U3.1 U3.3
pads on no net: D1.1 U1.1 U1.3 U1.7 U1.8 U1.9 U1.10 U1.11 U1.12 U1.17 U1.20 U1.23 U1.26 U1.27 U1.28 U1.29 U1.32 U2.2 U2.6 U2.15 U2.16 U3.4

## Polygon pours and split planes (outlines as drawn)
GND on Top Layer "Top Layer-GND" (solid, pour order 96): 0,0 0,50 55,50 55,0
3V3 on Top Layer "Top Layer-3V3" (solid, pour order 78): 19,26 21.625,26 21.625,22.8 22.9,22.8 22.9,18 28.5,18 28.5,13.024 29,13.024 29,3.5 31.5,3.5 35.5,3.5 35.5,5.5 31.5,5.5 31.5,13.024 32,13.024 32,15 29.9,15 29.9,18.8 32.2,18.8 32.2,20.5 29.9,20.5 29.9,23.2 22.9,23.2 22.9,24.4 24.6,24.4 24.6,24.927 22.75,24.927 22.75,28 19,28
VUSB on Top Layer "Top Layer-VUSB" (solid, pour order 82): 37,4 39,4 39,5.75 52.1,5.75 52.1,9.1 54.3,9.1 54.3,10.8 50.5,10.8 50.5,8.5 48,8.5 48,7.25 44.7,7.25 44.7,12.625 37.625,12.625 35.683,12.625 35.683,14.933 35.25,14.925 35.225,12.625 35,12.625 35,11 42,11 43.35,11 43.365,7.25 38.5,7.25 37,7.25 37,6 38.5,6 38.5,5 37,5
VSERVO on Top Layer "Top Layer-VSERVO 1" (solid, pour order 84): 17.3,24.3 17.3,24.8 20.5,24.8 20.5,7 23.75,7 23.75,3.75 19.75,3.75 19.75,5.25 17.25,5.25 17.25,7 19,7 19,24.3
3V3 on Top Layer "Top Layer-3V3 2" (solid, pour order 56): 17.5,40.25 17.5,46.75 19.25,46.75 19.25,41.75 23.75,41.75 23.75,39 26.2,39 28.5,39 28.5,35.425 32.125,35.4 32.125,34.9 28.5,34.875 28.5,34.25 27.075,34.25 27.075,38.2 23.75,38.2 22.25,38.2 22.25,40.25
NetD1_5 on Top Layer "Top Layer-NetD1_5" (solid, pour order 6): 47.9,8.7 50.3,8.7 50.3,11.9 49.4,12.8 49.4,15.7 50.9,15.7 50.9,16.2 47.9,16.2 47.9,11.9 47.9,14.4 47.9,10.9
VSERVO on Top Layer "Top Layer-VSERVO" (solid, pour order 86): 0,0
no net on Top Layer "Top Layer-No Net 5" (solid, pour order 34): 17.2,46.75
no net on Top Layer "Top Layer-No Net 6" (solid, pour order 30): 17.2,46.75
no net on Top Layer "Top Layer-No Net" (solid, pour order 28): 23.075,18.475
no net on Top Layer "Top Layer-No Net 1" (solid, pour order 20): 37.175,14.3
no net on Top Layer "Top Layer-No Net 2" (solid, pour order 16): 37.1,14.6
no net on Top Layer "Top Layer-No Net 3" (solid, pour order 14): 37.1,14.8
no net on Top Layer "Top Layer-No Net 4" (solid, pour order 12): 36.5,20.5
GND on Bottom Layer "Bottom Layer-GND" (solid, pour order 94): 0,0 0,50 55,50 55,0
VSERVO on Bottom Layer "Bottom Layer-VSERVO" (solid, pour order 70): 7,5 7,1 26,1 26,8 14,8 14,5 9,5 9,8.71 12,8.71 12,10.71 9,10.71 9,19.14 12,19.14 12,21.14 9,21.14 9,29.57 12,29.57 12,31.57 9,31.57 9,40 12,40 12,42 9,42 9,44 7,44 7,42 4,42 4,40 7,40 7,31.57 4,31.57 4,29.57 7,29.57 7,21.14 4,21.14 4,19.14 7,19.14 7,10.71 4,10.71 4,8.71 7,8.71 7,5
no net on Bottom Layer "Bottom Layer-No Net" (solid, pour order 46): 6.299,44.78
no net on Bottom Layer "Bottom Layer-No Net 3" (solid, pour order 42): 6.4,34
no net on Bottom Layer "Bottom Layer-No Net 4" (solid, pour order 40): 6.4,5.9
no net on Bottom Layer "Bottom Layer-No Net 5" (solid, pour order 36): 6.5,44.75
3V3 on Bottom Layer "Bottom Layer-No Net 1" (solid, pour order 26): 19,26 19,38.5 17.25,38.5 17.25,44.75 21.5,44.75 21.5,38.5 20.5,38.5 20.5,28 22.75,28 22.75,26
no net on Bottom Layer "Bottom Layer-No Net 2" (solid, pour order 24): 22,24.25

## Keep-outs
Top Layer:
  region: 50.8,6.4
  region: 57,3.3

## Other copper
Bottom Layer:
  region: 37.04,43.46

## Silkscreen, mask and mechanical layers (free items; w line width, h text height)
Mechanical 1:
  the board outline again, w1.2

## Text inside footprints (layer, text, board x,y; h text height)
J2: Top Overlay "5" at 41.54,43.925 h1.02 r180; Top Overlay "2" at 33.14,46.465 h1.02 r180; Top Overlay "1" at 33.04,43.925 h1.02 r180; Top Overlay "6" at 41.54,46.465 h1.02 r180
U1: Mechanical 13 "*" at 32.058,37.315 h1.27